# Altium PCB 底板201604281.PcbDoc (part 1 of 2)
Units mm, origin at the board's own origin, x right, y up, seen from the top; angles counter-clockwise.
Board outline 123.5 x 102.51 mm, 2 copper layers (Top Layer, Bottom Layer); 216 components, 211 nets, 709 pads, 236 vias.
Unrouted connection lines stored in the file: 63.
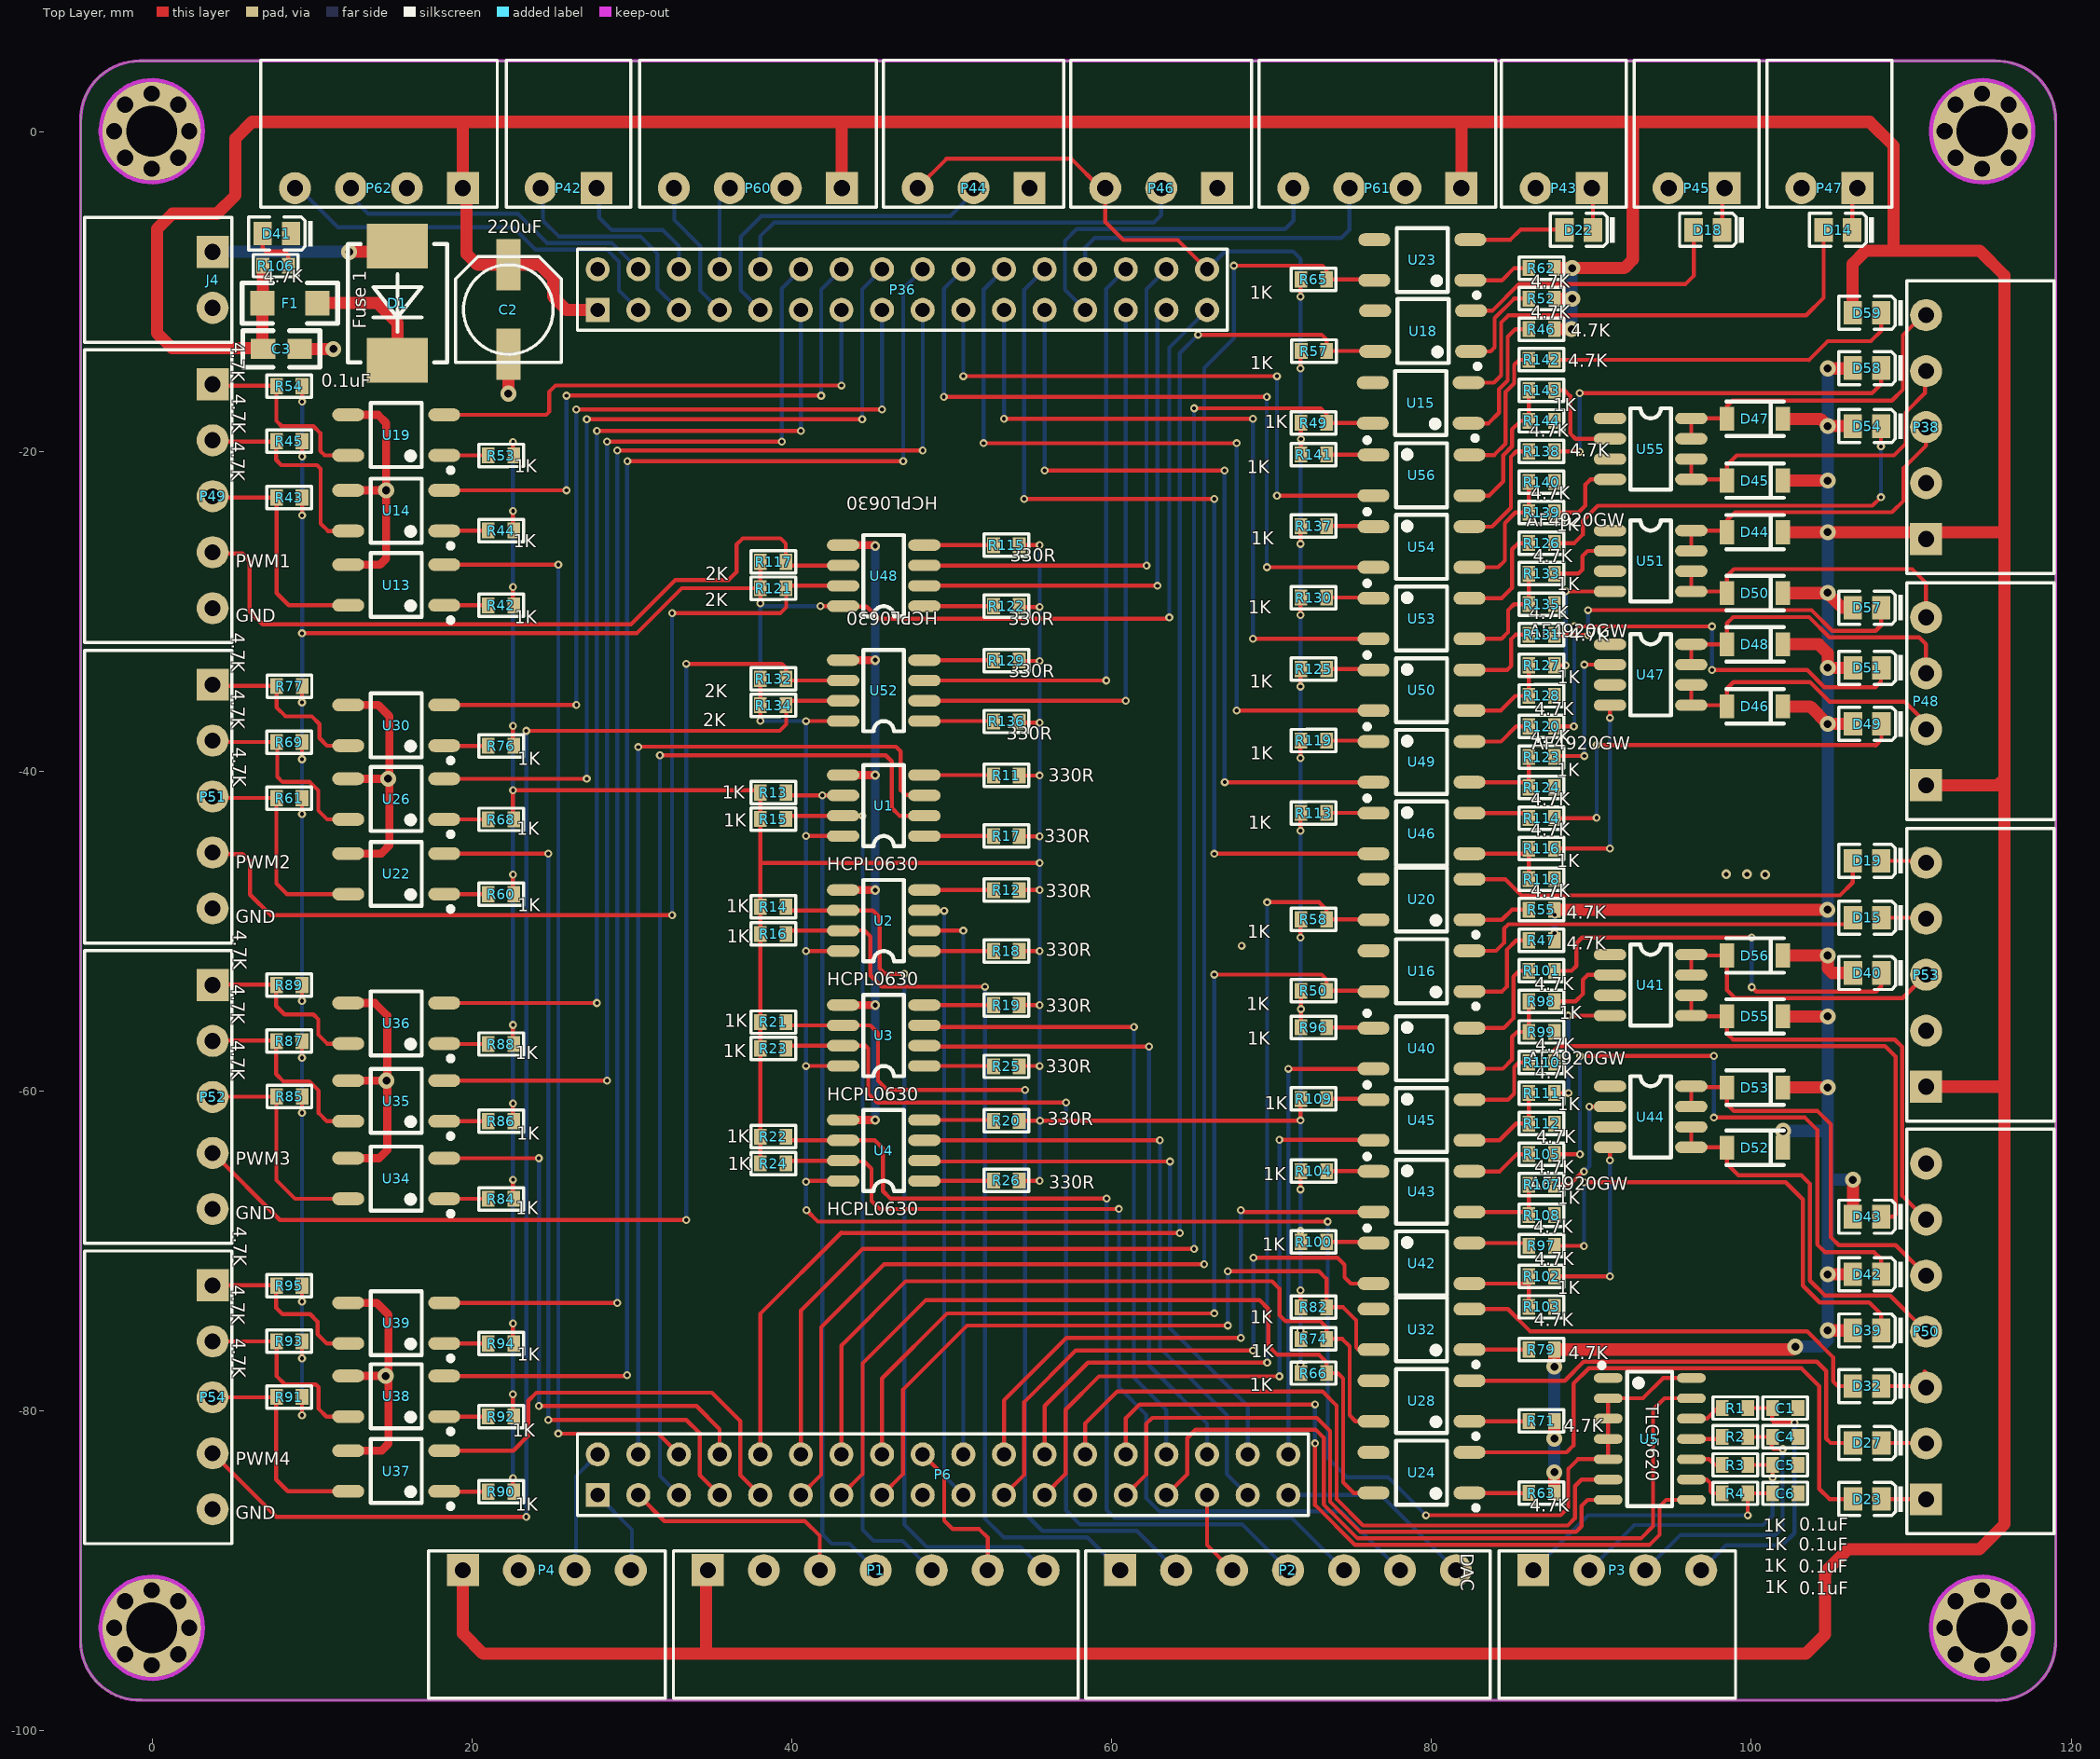
[diagram p0: Top Layer view]
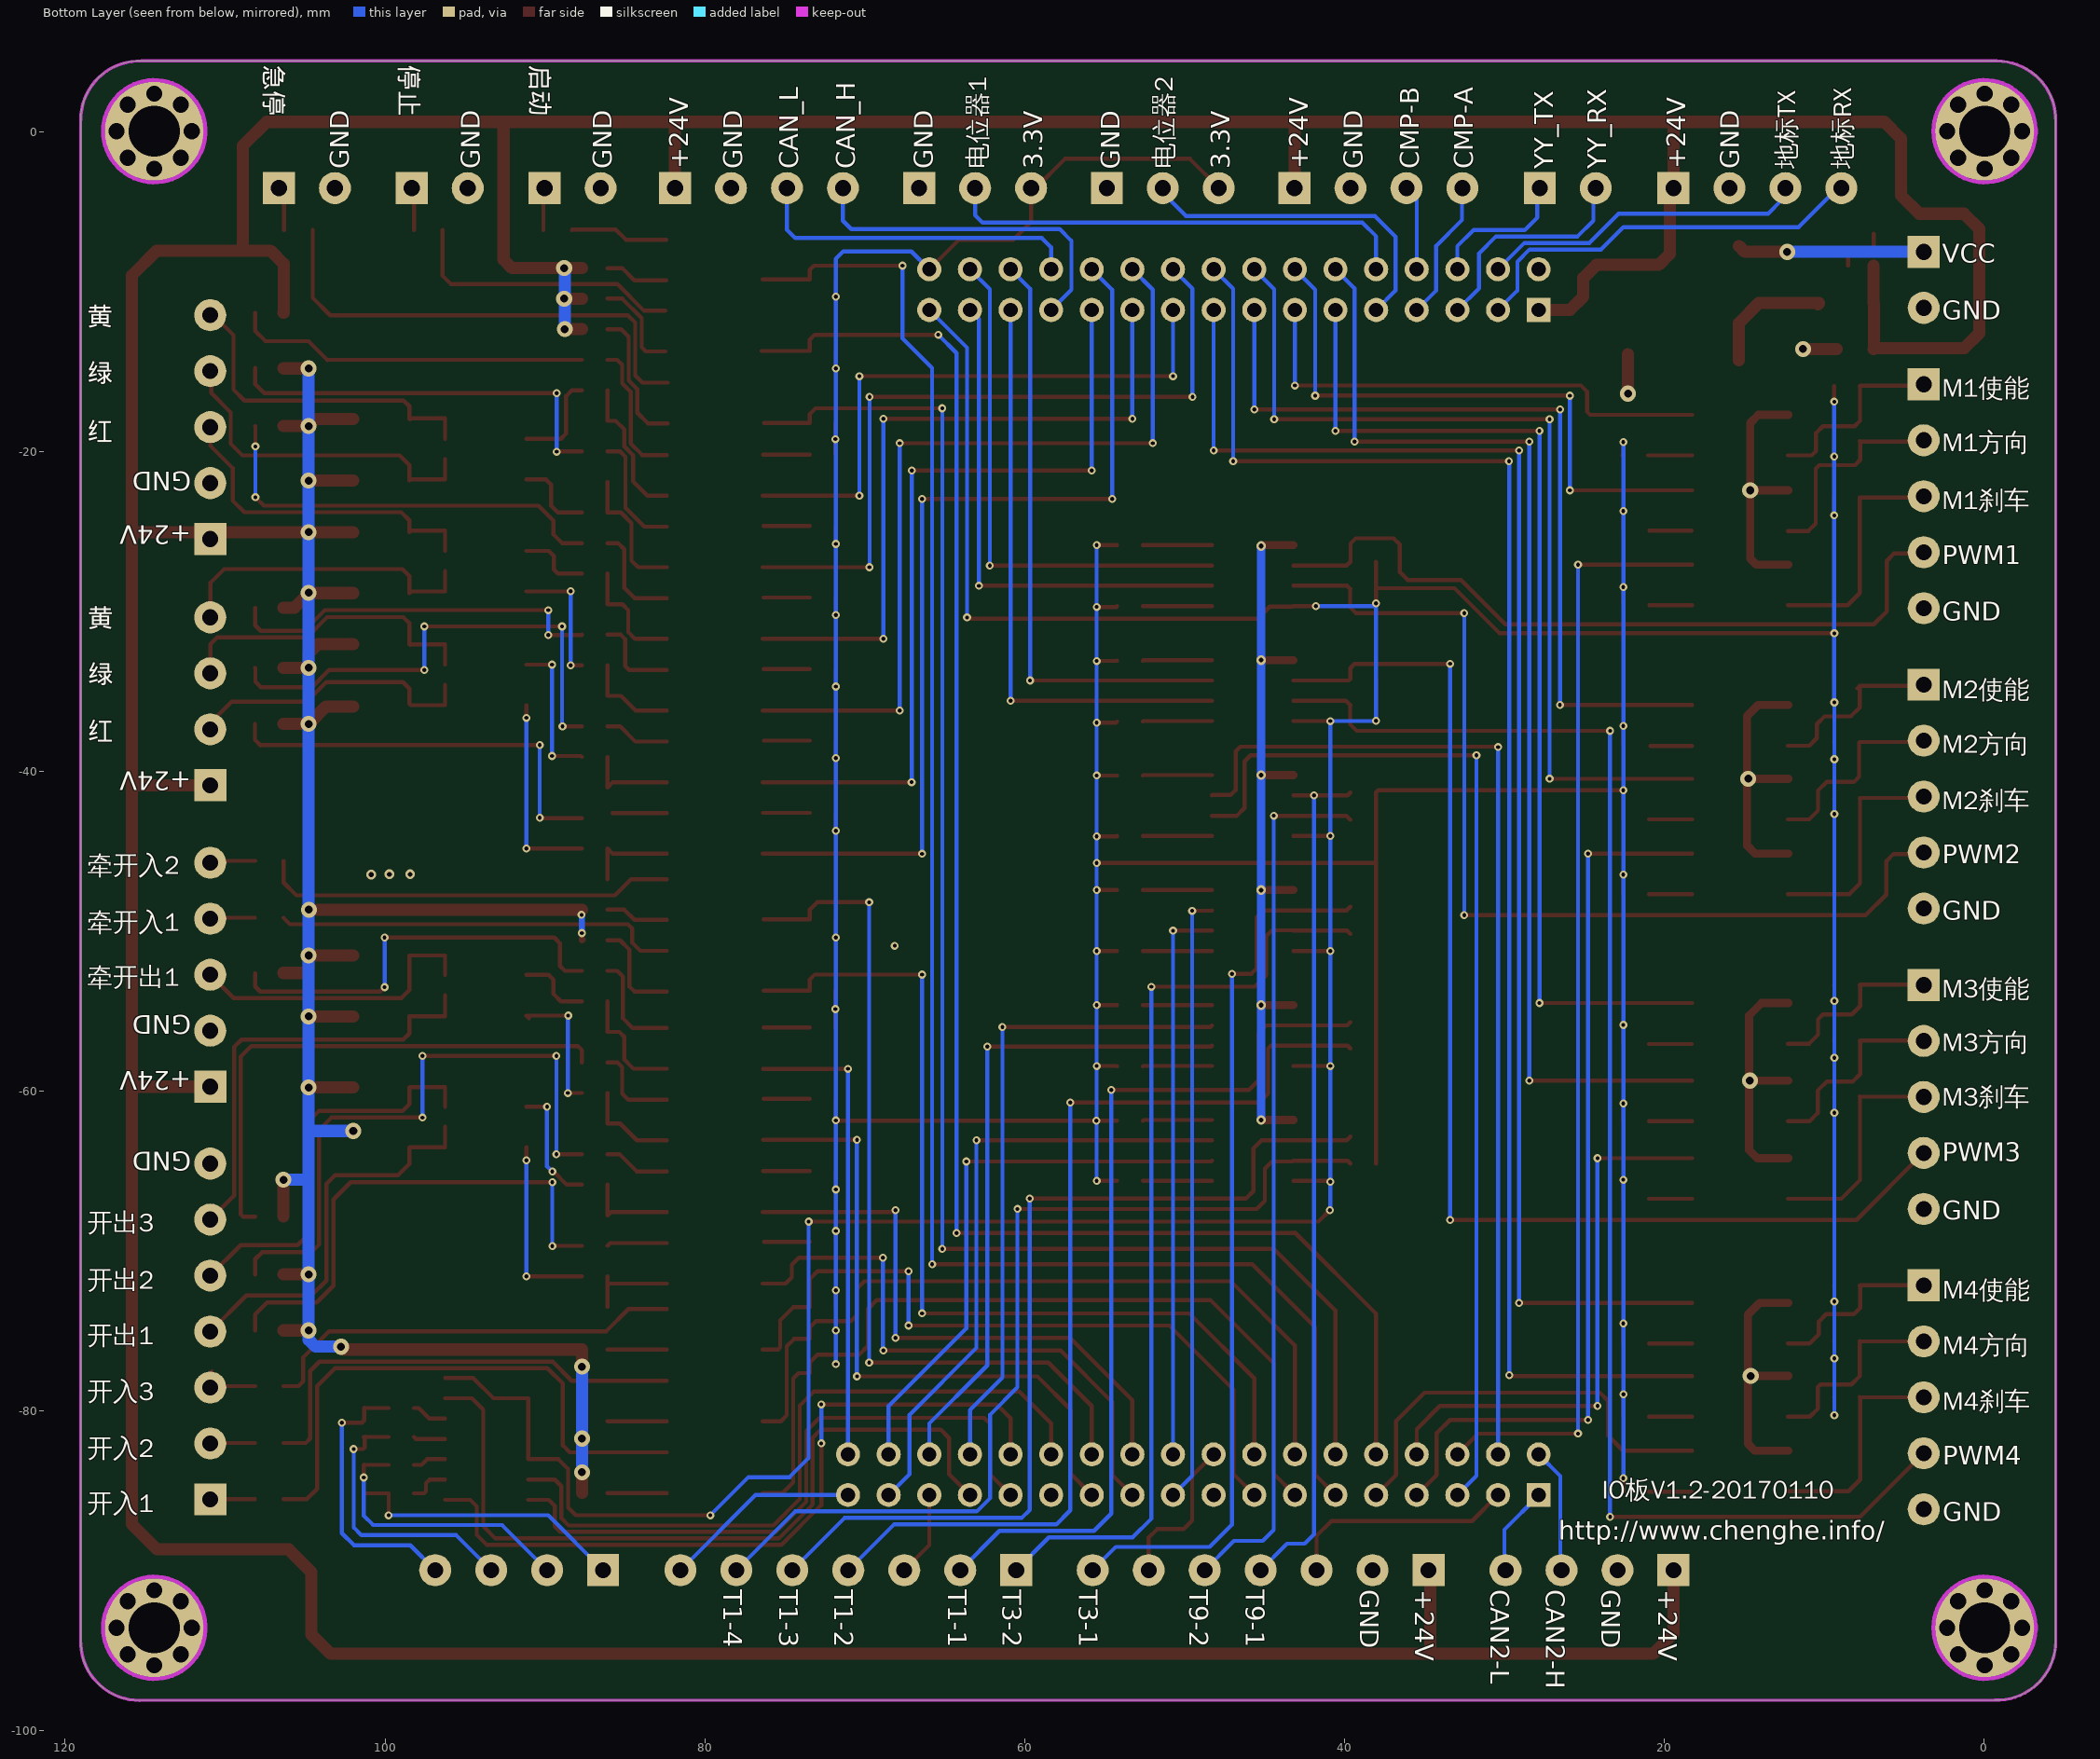
[diagram p1: Bottom Layer view, seen from below]
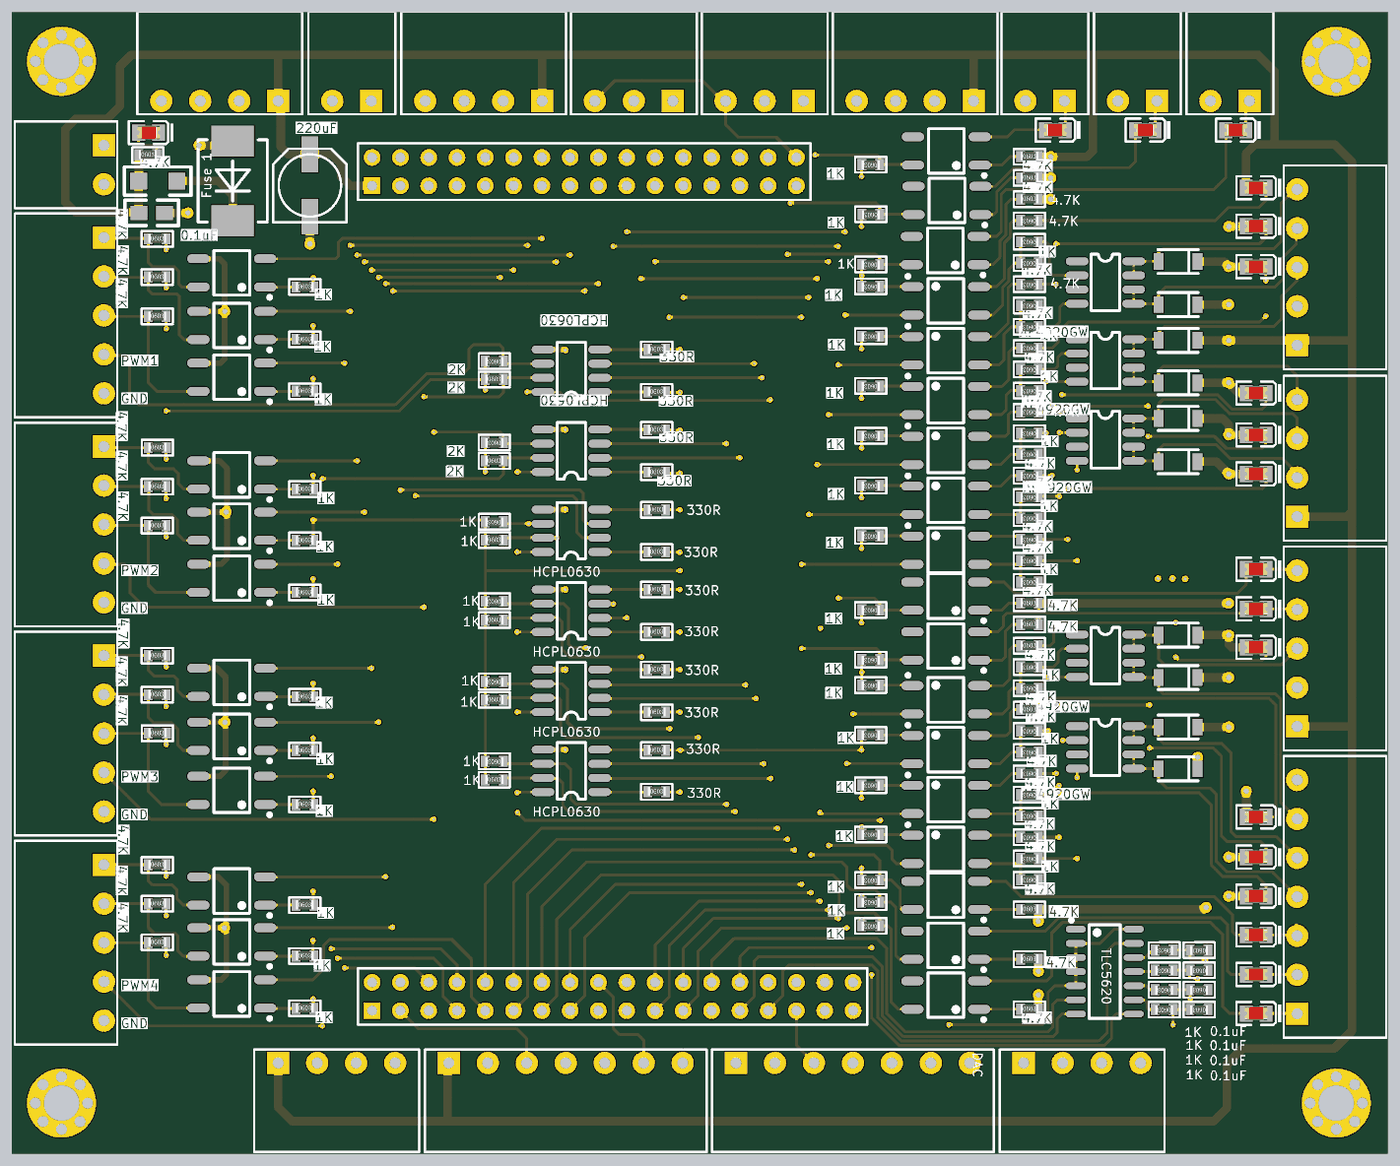
[diagram p3: 3D render of the assembled board from above, using the file's embedded part models]

## Layer stack, top to bottom
Top Solder: solder mask 0.0102, Solder Resist, Dk 3.5
Top Layer: signal copper 0.0356
Dielectric1: dielectric 0.32, FR-4, Dk 4.8
Bottom Layer: signal copper 0.0356
Bottom Solder: solder mask 0.0102, Solder Resist, Dk 3.5

## Board outline
-4.47,-94.389 -4.47,0.61 cw(c-0.792,0.731) -0.792,4.412 -0.792,4.42 115.222,4.42 115.222,4.415 cw(c115.344,0.737) 119.024,0.737 119.03,0.737 119.03,-94.285 cw(c115.351,-94.406) 115.351,-98.087 115.351,-98.08 -0.669,-98.069 -0.669,-98.067 cw(c-0.79,-94.389)

## Design rules (kind name [scope] priority, off if disabled: settings)
Clearance inpolygon [InPolygon] p1: gap=0.4
Clearance [All] p2: gap=0.152
HoleSize [All] p1: absolutevalues=TRUE maxlimit=12.7 minlimit=0.025 maxpercent=80.000 minpercent=20.000
HoleToHoleClearance [All] p1: gap=0.152 allowstackedmicrovias=TRUE
MinimumSolderMaskSliver [All] p1: minsoldermaskwidth=0.051
PolygonConnect [All] p1: connectstyle=Relief reliefconductorwidth=0.254 reliefentries=4 polygonreliefangle="90 Angle" airgapwidth=0.254
RoutingVias [All] p1: holewidth=0.711 width=1.27 viastyle="Through Hole" minholewidth=0.711 minwidth=1.27 maxholewidth=0.711 maxwidth=1.27
SilkToSilkClearance [All] p1: silktosilkclearance=-1
SilkToSolderMaskClearance SilkscreenOverComponentPads [IsPad] p1: minsilkscreentomaskgap=-1 clearancetoexposedcopper=TRUE
SolderMaskExpansion [All] p1: expansion=0.102
Width [All] p1: maxlimit=2.54 minlimit=0.152 preferedwidth=0.254 minimp=50.000000 maximp=50.000000 favimp=50.000000
25 further rules are at their usual default settings.

## Components (designator, comment, footprint, x,y, rotation, side; value= is the part's Value field where it differs from the comment)
C1 "0.1uF" 0603 102.121,-79.807 r180 top
C2 "220uF" CC6.56.5 22.276,-11.125 r270 top
C3 "0.1uF" 0805 6.934,-13.589 r0 top
C4 "0.1uF" 0603 102.121,-81.61 r180 top
C5 "0.1uF" 0603 102.121,-83.363 r180 top
C6 "0.1uF" 0603 102.121,-85.141 r180 top
D1 "" LC-SMC(DO-214AB)_S2 15.342,-10.719 r90 top
D14 "LED0" LC-0805_LED_S1 104.521,-6.147 r180 top
D15 "LED0" LC-0805_LED_S1 106.35,-49.149 r180 top
D18 "LED0" LC-0805_LED_S1 96.393,-6.147 r180 top
D19 "LED0" LC-0805_LED_S1 106.34,-45.593 r180 top
D22 "LED0" LC-0805_LED_S1 88.316,-6.147 r180 top
D23 "LED0" LC-0805_LED_S1 106.35,-85.496 r180 top
D27 "LED0" LC-0805_LED_S1 106.35,-81.991 r180 top
D32 "LED0" LC-0805_LED_S1 106.34,-78.435 r180 top
D39 "LED0" LC-0805_LED_S1 106.34,-74.955 r180 top
D40 "LED0" LC-0805_LED_S1 106.35,-52.603 r180 top
D41 "LED0" LC-0805_LED_S1 6.909,-6.375 r180 top
D42 "LED0" LC-0805_LED_S1 106.34,-71.45 r180 top
D43 "LED0" LC-0805_LED_S1 106.34,-67.843 r180 top
D44 "" LC-LL-34 101.976,-25.044 r180 top
D45 "" LC-LL-34 101.976,-21.819 r180 top
D46 "" LC-LL-34 101.976,-35.941 r180 top
D47 "" LC-LL-34 101.976,-17.958 r180 top
D48 "" LC-LL-34 101.976,-32.055 r180 top
D49 "LED0" LC-0805_LED_S1 106.35,-37.033 r180 top
D50 "" LC-LL-34 101.976,-28.854 r180 top
D51 "LED0" LC-0805_LED_S1 106.35,-33.528 r180 top
D52 "" LC-LL-34 101.976,-63.525 r180 top
D53 "" LC-LL-34 101.976,-59.766 r180 top
D54 "LED0" LC-0805_LED_S1 106.34,-18.415 r180 top
D55 "" LC-LL-34 101.976,-55.321 r180 top
D56 "" LC-LL-34 101.976,-51.511 r180 top
D57 "LED0" LC-0805_LED_S1 106.34,-29.769 r180 top
D58 "LED0" LC-0805_LED_S1 106.34,-14.783 r180 top
D59 "LED0" LC-0805_LED_S1 106.34,-11.328 r180 top
F1 "Fuse 1" 1206 10.338,-10.744 r180 top
J4 "CON2" DZ-2-3.5 3.785,-7.518 r270 top
P1 "通讯IO" DZ-7-3.5 34.747,-89.941 r0 top
P2 "通讯IO" DZ-7-3.5 60.528,-89.941 r0 top
P3 "DAC" DZ-4-3.5 86.36,-89.941 r0 top
P4 "DAC" DZ-4-3.5 19.431,-89.941 r0 top
P6 "Header 18X2" HDR2X18 27.864,-85.242 r0 top locked
P36 "Header 16X2" HDR2X16 27.864,-11.151 r0 top locked
P38 "三色灯" DZ-5-3.5 110.922,-25.476 r90 top
P42 "语音板通信" DZ-2-3.5 27.788,-3.531 r180 top
P43 "启动" DZ-2-3.5 90.018,-3.531 r180 top
P44 "电位器1" DZ-3-3.5 54.864,-3.531 r180 top
P45 "停止" DZ-2-3.5 98.323,-3.531 r180 top
P46 "电位器2" DZ-3-3.5 66.599,-3.531 r180 top
P47 "急停" DZ-2-3.5 106.629,-3.531 r180 top
P48 "三色灯" DZ-4-3.5 110.922,-40.869 r90 top
P49 "电机1" DZ-5-3.5 3.785,-15.798 r270 top
P50 "通讯IO" DZ-7-3.5 110.922,-85.522 r90 top
P51 "电机2" DZ-5-3.5 3.785,-34.577 r270 top
P52 "电机3" DZ-5-3.5 3.785,-53.357 r270 top
P53 "牵引杆" DZ-5-3.5 110.922,-59.715 r90 top
P54 "电机4" DZ-5-3.5 3.785,-72.136 r270 top
P60 "触摸屏RS485" DZ-4-3.5 43.129,-3.531 r180 top
P61 "CAN" DZ-4-3.5 81.864,-3.531 r180 top
P62 "RFID_RS232" DZ-4-3.5 19.431,-3.531 r180 top
R1 "1K" 0603 98.984,-79.807 r180 top
R2 "1K" 0603 98.984,-81.61 r180 top
R3 "1K" 0603 98.984,-83.363 r180 top
R4 "1K" 0603 98.984,-85.141 r180 top
R11 "330R" 0603 53.416,-40.259 r0 top
R12 "330R" 0603 53.416,-47.422 r0 top
R13 "1K" 0603 38.837,-41.326 r180 top
R14 "1K" 0603 38.837,-48.463 r180 top
R15 "1K" 0603 38.837,-42.977 r0 top
R16 "1K" 0603 38.837,-50.165 r0 top
R17 "330R" 0603 53.416,-44.044 r0 top
R18 "330R" 0603 53.416,-51.232 r0 top
R19 "330R" 0603 53.416,-54.61 r0 top
R20 "330R" 0603 53.416,-61.849 r0 top
R21 "1K" 0603 38.837,-55.677 r180 top
R22 "1K" 0603 38.837,-62.84 r180 top
R23 "1K" 0603 38.837,-57.328 r0 top
R24 "1K" 0603 38.837,-64.516 r0 top
R25 "330R" 0603 53.416,-58.445 r0 top
R26 "330R" 0603 53.416,-65.583 r0 top
R42 "1K" 0603 21.819,-29.616 r0 top
R43 "4.7K" 0603 8.577,-22.879 r0 top
R44 "1K" 0603 21.819,-24.943 r0 top
R45 "4.7K" 0603 8.577,-19.355 r0 top
R46 "4.7K" 0603 86.881,-12.355 r0 top
R47 "4.7K" 0603 86.881,-50.559 r0 top
R49 "1K" 0603 72.631,-18.212 r180 top
R50 "1K" 0603 72.631,-53.721 r180 top
R52 "4.7K" 0603 86.881,-10.445 r0 top
R53 "1K" 0603 21.819,-20.244 r0 top
R54 "4.7K" 0603 8.577,-15.919 r0 top
R55 "4.7K" 0603 86.881,-48.649 r0 top
R57 "1K" 0603 72.644,-13.716 r180 top
R58 "1K" 0603 72.631,-49.251 r180 top
R60 "1K" 0603 21.819,-47.676 r0 top
R61 "4.7K" 0603 8.577,-41.675 r0 top
R62 "4.7K" 0603 86.881,-8.534 r0 top
R63 "4.7K" 0603 86.881,-85.115 r0 top
R65 "1K" 0603 72.631,-9.246 r180 top
R66 "1K" 0603 72.631,-77.622 r180 top
R68 "1K" 0603 21.819,-43.002 r0 top
R69 "4.7K" 0603 8.577,-38.169 r0 top
R71 "4.7K" 0603 86.881,-80.62 r0 top
R74 "1K" 0603 72.631,-75.489 r180 top
R76 "1K" 0603 21.819,-38.405 r0 top
R77 "4.7K" 0603 8.585,-34.671 r0 top
R79 "4.7K" 0603 86.881,-76.149 r0 top
R82 "1K" 0603 72.631,-73.508 r180 top
R84 "1K" 0603 21.819,-66.726 r0 top
R85 "4.7K" 0603 8.585,-60.325 r0 top
R86 "1K" 0603 21.819,-61.874 r0 top
R87 "4.7K" 0603 8.577,-56.864 r0 top
R88 "1K" 0603 21.819,-57.048 r0 top
R89 "4.7K" 0603 8.577,-53.359 r0 top
R90 "1K" 0603 21.819,-85.039 r0 top
R91 "4.7K" 0603 8.577,-79.114 r0 top
R92 "1K" 0603 21.819,-80.34 r0 top
R93 "4.7K" 0603 8.577,-75.634 r0 top
R94 "1K" 0603 21.819,-75.768 r0 top
R95 "4.7K" 0603 8.577,-72.155 r0 top
R96 "1K" 0603 72.631,-56.007 r180 top
R97 "4.7K" 0603 86.881,-69.662 r180 top
R98 "1K" 0603 86.881,-54.38 r180 top
R99 "4.7K" 0603 86.881,-56.29 r180 top
R100 "1K" 0603 72.631,-69.418 r180 top
R101 "4.7K" 0603 86.881,-52.47 r0 top
R102 "1K" 0603 86.881,-71.572 r180 top
R103 "4.7K" 0603 86.881,-73.482 r180 top
R104 "1K" 0603 72.631,-64.999 r180 top
R105 "4.7K" 0603 86.881,-63.931 r180 top
R106 "4.7K" 0603 7.722,-8.382 r0 top
R107 "1K" 0603 86.881,-65.841 r180 top
R108 "4.7K" 0603 86.881,-67.752 r180 top
R109 "1K" 0603 72.631,-60.477 r180 top
R110 "4.7K" 0603 86.881,-58.2 r0 top
R111 "1K" 0603 86.881,-60.111 r180 top
R112 "4.7K" 0603 86.881,-62.021 r180 top
R113 "1K" 0603 72.631,-42.596 r180 top
R114 "4.7K" 0603 86.881,-42.919 r180 top
R115 "330R" 0603 53.416,-25.857 r0 top
R116 "1K" 0603 86.881,-44.829 r180 top
R117 "2K" 0603 38.837,-26.899 r180 top
R118 "4.7K" 0603 86.881,-46.739 r180 top
R119 "1K" 0603 72.631,-38.075 r180 top
R120 "4.7K" 0603 86.881,-37.188 r180 top
R121 "2K" 0603 38.837,-28.55 r0 top
R122 "330R" 0603 53.416,-29.667 r0 top
R123 "1K" 0603 86.881,-39.098 r180 top
R124 "4.7K" 0603 86.881,-41.008 r180 top
R125 "1K" 0603 72.631,-33.604 r180 top
R126 "4.7K" 0603 86.881,-25.727 r180 top
R127 "1K" 0603 86.881,-33.367 r180 top
R128 "4.7K" 0603 86.881,-35.278 r180 top
R129 "330R" 0603 53.416,-33.071 r0 top
R130 "1K" 0603 72.631,-29.134 r180 top
R131 "4.7K" 0603 86.881,-31.457 r180 top
R132 "2K" 0603 38.837,-34.214 r180 top
R133 "1K" 0603 86.881,-27.637 r180 top
R134 "2K" 0603 38.837,-35.865 r0 top
R135 "4.7K" 0603 86.881,-29.547 r180 top
R136 "330R" 0603 53.416,-36.881 r0 top
R137 "1K" 0603 72.631,-24.663 r180 top
R138 "4.7K" 0603 86.881,-19.996 r180 top
R139 "1K" 0603 86.881,-23.816 r180 top
R140 "4.7K" 0603 86.881,-21.906 r180 top
R141 "1K" 0603 72.631,-20.193 r180 top
R142 "4.7K" 0603 86.881,-14.265 r180 top
R143 "1K" 0603 86.881,-16.175 r180 top
R144 "4.7K" 0603 86.881,-18.086 r180 top
U1 "HCPL0630" SO-8 48.285,-44.044 r180 top
U2 "HCPL0630" SO-8 48.285,-51.232 r180 top
U3 "HCPL0630" SO-8 48.285,-58.42 r180 top
U4 "HCPL0630" SO-8 48.285,-65.608 r180 top
U5 "TLC5620" LC-SOIC-14_150mil 93.645,-81.737 r270 top
U13 "TLP127" LC-SOP-4_P2.54 18.263,-29.616 r180 top
U14 "TLP127" LC-SOP-4_P2.54 18.263,-24.968 r180 top
U15 "TLP127" LC-SOP-4_P2.54 82.321,-18.237 r180 top
U16 "TLP127" LC-SOP-4_P2.54 82.372,-53.762 r180 top
U18 "TLP127" LC-SOP-4_P2.54 82.474,-13.741 r180 top
U19 "TLP127" LC-SOP-4_P2.54 18.263,-20.244 r180 top
U20 "TLP127" LC-SOP-4_P2.54 82.372,-49.283 r180 top
U22 "TLP127" LC-SOP-4_P2.54 18.263,-47.676 r180 top
U23 "TLP127" LC-SOP-4_P2.54 82.423,-9.296 r180 top
U24 "TLP127" LC-SOP-4_P2.54 82.372,-85.115 r180 top
U26 "TLP127" LC-SOP-4_P2.54 18.263,-43.002 r180 top
U28 "TLP127" LC-SOP-4_P2.54 82.372,-80.636 r180 top
U30 "TLP127" LC-SOP-4_P2.54 18.263,-38.393 r180 top
U32 "TLP127" LC-SOP-4_P2.54 82.372,-76.157 r180 top
U34 "TLP127" LC-SOP-4_P2.54 18.263,-66.726 r180 top
U35 "TLP127" LC-SOP-4_P2.54 18.263,-61.874 r180 top
U36 "TLP127" LC-SOP-4_P2.54 18.263,-57.023 r180 top
U37 "TLP127" LC-SOP-4_P2.54 18.263,-85.014 r180 top
U38 "TLP127" LC-SOP-4_P2.54 18.263,-80.34 r180 top
U39 "TLP127" LC-SOP-4_P2.54 18.263,-75.768 r180 top
U40 "TLP127" LC-SOP-4_P2.54 76.372,-56.051 r0 top
U41 "AF4920GW" SO-8 91.161,-51.46 r0 top
U42 "TLP127" LC-SOP-4_P2.54 76.372,-69.488 r0 top
U43 "TLP127" LC-SOP-4_P2.54 76.372,-65.009 r0 top
U44 "AF4920GW" SO-8 91.161,-59.69 r0 top
U45 "TLP127" LC-SOP-4_P2.54 76.372,-60.53 r0 top
U46 "TLP127" LC-SOP-4_P2.54 76.372,-42.614 r0 top
U47 "AF4920GW" SO-8 91.161,-32.055 r0 top
U48 "HCPL0630" SO-8 48.285,-29.667 r180 top
U49 "TLP127" LC-SOP-4_P2.54 76.372,-38.135 r0 top
U50 "TLP127" LC-SOP-4_P2.54 76.372,-33.656 r0 top
U51 "AF4920GW" SO-8 91.161,-24.943 r0 top
U52 "HCPL0630" SO-8 48.285,-36.855 r180 top
U53 "TLP127" LC-SOP-4_P2.54 76.372,-29.177 r0 top
U54 "TLP127" LC-SOP-4_P2.54 76.372,-24.698 r0 top
U55 "AF4920GW" SO-8 91.161,-17.932 r0 top
U56 "TLP127" LC-SOP-4_P2.54 76.372,-20.218 r0 top
? "" "定位孔 Φ3.2" -0.025,0.025 r0 top
? "" "定位孔 Φ3.2" 114.427,0.025 r0 top
? "" "定位孔 Φ3.2" -0.025,-93.548 r0 top
? "" "定位孔 Φ3.2" 114.427,-93.548 r0 top

## Footprints (in the part's own frame and the unit in brackets; to place one, negate y for a bottom-side part, rotate by r counter-clockwise, add the part's x,y. Pads: shape width x height; smd on the part's side, far side on the other; paste and mask are expansions set on the pad)
0603 [mm]
  rect 0.8x1 smd: 1(-0.8,0) 2(0.8,0)
  silkscreen extent -1.4,-0.7 1.4,0.7, body extent -0.8,-0.37 0.8,0.43, height 0.45
0805 [mil]
  rect 60x50 smd: 1(0,0) 2(90,0)
  silkscreen extent -50,-45 140,45
1206 [mil]
  rect 60x60 smd: 1(0.22,-0.6) 2(135.22,-0.6)
  silkscreen extent -50,-51 185,49
CC6.56.5 [mm]
  rect 3.2x1.5 smd: 1(-2.794,0) 2(2.8,0)
  silkscreen extent -3.3,-3.3 3.3,3.3
DZ-2-3.5 [mm]
  rect 2x2 hole 1: 1(0,0)
  round 2 hole 1: 2(3.5,0)
  silkscreen extent -2.15,-8 5.65,1.2
DZ-3-3.5 [mm]
  rect 2x2 hole 1: 1(0,0)
  round 2 hole 1: 2(3.5,0) 3(7,0)
  silkscreen extent -2.15,-8 9.15,1.2
DZ-4-3.5 [mm]
  rect 2x2 hole 1: 1(0,0)
  round 2 hole 1: 2(3.5,0) 3(7,0) 4(10.5,0)
  silkscreen extent -2.15,-8 12.65,1.2
DZ-5-3.5 [mm]
  rect 2x2 hole 1: 1(0,0)
  round 2 hole 1: 2(3.5,0) 3(7,0) 4(10.5,0) 5(14,0)
  silkscreen extent -2.15,-8 16.15,1.2
DZ-7-3.5 [mm]
  rect 2x2 hole 1: 1(0,0)
  round 2 hole 1: 2(3.5,0) 3(7,0) 4(10.5,0) 5(14,0) 6(17.5,0) 7(21,0)
  silkscreen extent -2.15,-8 23.15,1.2
HDR2X16 [mm] "Connector; H"
  rect 1.5x1.5 hole 0.9: 1(0,0)
  round 1.5 hole 0.9: 2(0,2.54) 3(2.54,0) 4(2.54,2.54) 5(5.08,0) 6(5.08,2.54) 7(7.62,0) 8(7.62,2.54) 9(10.16,0) 10(10.16,2.54) 11(12.7,0) 12(12.7,2.54) 13(15.24,0) 14(15.24,2.54) 15(17.78,0) 16(17.78,2.54) 17(20.32,0) 18(20.32,2.54) 19(22.86,0) 20(22.86,2.54) 21(25.4,0) 22(25.4,2.54) 23(27.94,0) 24(27.94,2.54) 25(30.48,0) 26(30.48,2.54) 27(33.02,0) 28(33.02,2.54) 29(35.56,0) 30(35.56,2.54) 31(38.1,0) 32(38.1,2.54)
  silkscreen extent -1.27,-1.27 39.37,3.81
HDR2X18 [mm] "Connector; Header; 18"
  rect 1.5x1.5 hole 0.9: 1(0,0)
  round 1.5 hole 0.9: 2(0,2.54) 3(2.54,0) 4(2.54,2.54) 5(5.08,0) 6(5.08,2.54) 7(7.62,0) 8(7.62,2.54) 9(10.16,0) 10(10.16,2.54) 11(12.7,0) 12(12.7,2.54) 13(15.24,0) 14(15.24,2.54) 15(17.78,0) 16(17.78,2.54) 17(20.32,0) 18(20.32,2.54) 19(22.86,0) 20(22.86,2.54) 21(25.4,0) 22(25.4,2.54) 23(27.94,0) 24(27.94,2.54) 25(30.48,0) 26(30.48,2.54) 27(33.02,0) 28(33.02,2.54) 29(35.56,0) 30(35.56,2.54) 31(38.1,0) 32(38.1,2.54) 33(40.64,0) 34(40.64,2.54) 35(43.18,0) 36(43.18,2.54)
  silkscreen extent -1.27,-1.27 44.45,3.81
LC-0805_LED_S1 [mm]
  rect 1.16x1.47 smd: A(0.001,0) K(-1.779,0)
  silkscreen extent -3.13,-1.04 0.88,1.03, body extent -1.9,-0.62 0.12,0.62, height 1.1
LC-LL-34 [mm]
  rect 0.9x1.5 smd: 1(3.5,0) 2(0,0)
  silkscreen extent -0.05,-1.08 3.55,1.07
LC-SMC(DO-214AB)_S2 [mil]
  rect 110x150 smd: 1(140.49,0) 2(-140.49,0)
  silkscreen extent -146,-122 146,122
LC-SOIC-14_150mil [mm]
  oval 0.6x1.8 smd: 1(-3.81,-2.6) 2(-2.54,-2.6) 3(-1.27,-2.6) 4(0,-2.6) 5(1.27,-2.6) 6(2.54,-2.6) 7(3.81,-2.6) 8(3.81,2.6) 9(2.54,2.6) 10(1.27,2.6) 11(0,2.6) 12(-1.27,2.6) 13(-2.54,2.6) 14(-3.81,2.6)
  silkscreen extent -4.75,-3.15 4.2,1.4
LC-SOP-4_P2.54 [mm]
  oval 2x0.8 smd: 1(0,0) 2(0,-2.54) 3(6,-2.54) 4(6,0)
  silkscreen extent -0.55,-3.27 4.6,1.08
SO-8 [mil]
  oval 80x28 smd: 1(0,0) 2(0,-50) 3(0,-100) 4(0,-150) 5(200,-150) 6(200,-100) 7(200,-50) 8(200,0)
  silkscreen extent 50,-175 150,25
"定位孔 Φ3.2" [mm]
  round 1 hole 1 unplated: 1(-2.35,0) 1(-1.662,-1.662) 1(-1.662,1.662) 1(0,-2.35) 1(0,2.35) 1(1.662,-1.662) 1(1.662,1.662) 1(2.35,0)
  round 6.2 hole 3.2: 1(0,0)
  Keep-Out Layer circle w0.254: c0,0 r3.2

## Part data
D1: library part DIODE
D14 D15 D18 D19 D22 D23 D27 D32 D39 D40 D41 D42 D43 D49 D51 D54 D57 D58 D59: "Typical INF"
D44 D45 D46 D47 D48 D50 D52 D53 D55 D56: library part DIODE, "Dio"
J4: "Connect"
P1 P2: library part "Header 7", "Header,"
P3 P4 P61: library part "Header 4", "Header,"
P6: "Header, 18-Pin, Dual row"
P36: "Header, 16-Pin, Dual row"
P38 P49 P51 P52 P53 P54: library part "Header 5", "Header, 5-P"
P42 P43 P45: library part "Header 2", "Header, 2-P"
P44 P46: library part "Header 3", "Header, 3-P"
P47: library part "Header 2", "Header,"
P48 P60 P62: library part "Header 4", "Header, 4-P"
P50: library part "Header 7", "Header, 7-P"
U1 U2 U3 U4: library part HC
U5: library part Compo
U41 U44 U47 U51 U55: library part AF492
U48 U52: library part HCPL06

## Via types
v1: diameter 0.5, hole 0.25, Top Layer to Bottom Layer, 198 vias
v2: diameter 1, hole 0.5, Top Layer to Bottom Layer, 29 vias
v3: diameter 0.6, hole 0.3, Top Layer to Bottom Layer, 9 vias

## Nets (pads, with @x,y where several pads share a name; then routed paths per layer and width w, separated by ;. In a path a pad name is that pad's centre, name@x,y a point inside that pad or via, vN(x,y) a via of type N, cw(c..) or ccw(c..) an arc to the next point about the centre after c; other vN are vias at no path point)
BY_KC1: P36.21 U53.2 | length 43.7
  Top Layer w0.254: v1(53.264,-17.958) v1(68.834,-17.958) ; v1(68.842,-31.717) U53.2@76.372,-31.717
  Bottom Layer w0.254: v1(53.264,-17.958) P36.21@53.264,-11.151 ; v1@68.834,-31.717 v1(68.834,-17.958)
BY_KC2: P36.20 U54.2 | length 46
  Top Layer w0.254: v1(49.505,-16.586) v1(69.698,-16.586) ; v1(69.706,-27.238) U54.2@76.372,-27.238
  Bottom Layer w0.254: v1(49.505,-16.586) 49.505,-9.83 P36.20@50.724,-8.611 ; v1@69.698,-27.238 v1(69.698,-16.586)
BY_KC3: P36.19 U56.2 | length 37.3
  Top Layer w0.254: v1(50.724,-15.291) v1(70.333,-15.291) ; v1(70.333,-22.758) U56.2@76.372,-22.758
  Bottom Layer w0.254: v1(50.724,-15.291) P36.19@50.724,-11.151 ; v1(70.333,-22.758) v1(70.333,-15.291)
BY_KC11: D44.1 P38.3 U51.7 U51.8 | length 21.2
  Top Layer w0.254: U51.7@96.241,-26.213 U51.8@96.241,-24.943 98.374,-24.943 D44.1@98.476,-25.044 98.476,-24.308 98.984,-23.8 108.788,-23.8 109.525,-23.063 109.525,-21.031 110.922,-19.634 P38.3@110.922,-18.273
BY_KC22: D45.1 P38.4 U55.5 U55.6 | length 21.5
  Top Layer w0.254: U55.6@96.241,-20.472 U55.5@96.241,-21.742 98.4,-21.742 D45.1@98.476,-21.819 98.476,-20.853 99.085,-20.244 108.915,-20.244 109.642,-19.517 109.642,-17.561 110.846,-16.358 110.846,-14.849 P38.4@110.922,-14.773
BY_KC33: D47.1 P38.5 U55.7 U55.8 | length 21.2
  Top Layer w0.254: U55.7@96.241,-19.202 U55.8@96.241,-17.932 98.4,-17.932 98.45,-17.983 D47.1@98.476,-17.958 98.476,-17.17 98.831,-16.815 108.788,-16.815 109.474,-16.129 109.474,-12.721 P38.5@110.922,-11.273
CAN2_H: P4.3 P6.2 | length 7.8
  Bottom Layer w0.254: P4.3@26.507,-89.941 26.507,-84.059 P6.2@27.864,-82.702
CAN2_L: P4.4 P6.1 | length 5.6
  Bottom Layer w0.254: P6.1@27.864,-85.242 27.864,-85.268 30.007,-87.411 P4.4@30.007,-89.941
CAN_H: P36.25 P61.4 | length 21.7
  Bottom Layer w0.254: P36.25@58.344,-11.151 57.074,-9.881 57.074,-6.833 57.81,-6.096 70.841,-6.096 71.364,-5.572 P61.4@71.364,-3.531
CAN_L: P36.26 P61.3 | length 21
  Bottom Layer w0.254: P36.26@58.344,-8.611 58.344,-7.239 58.928,-6.655 74.346,-6.655 74.864,-6.136 P61.3@74.864,-3.531
CLK: P6.27 U5.7 | length 41.1
  Top Layer w0.254: P6.27@60.884,-85.242 62.154,-83.972 62.154,-80.797 62.535,-80.416 72.822,-80.416 73.66,-81.255 73.66,-85.665 75.549,-87.554 89.027,-87.554 89.383,-87.198 89.383,-85.928 89.764,-85.547 U5.7@91.045,-85.547
DAC1: C1.2 P3.4 R1.1 | length 17.5
  Top Layer w0.254: R1.1@99.784,-79.807 101.244,-79.807 101.27,-79.781 101.295,-79.807 101.295,-80.569 101.448,-80.721 v1(102.692,-80.721)
  Bottom Layer w0.254: P3.4@96.86,-89.941 98.409,-88.392 101.93,-88.392 102.692,-87.63 v1(102.692,-80.721)
DAC2: C4.2 P3.3 R2.1 | length 17.6
  Top Layer w0.254: R2.1@99.784,-81.61 C4.2@101.27,-81.61 ; C4.2@101.244,-81.585 C4.2@101.27,-81.61 ; C4.2@101.321,-81.61 C4.2@101.27,-81.61 ; v1(101.956,-82.372) 101.371,-82.372 101.27,-82.271 C4.2@101.27,-81.61
  Bottom Layer w0.254: P3.3@93.36,-89.941 95.544,-87.757 101.473,-87.757 101.956,-87.274 v1(101.956,-82.372)
DAC3: C5.2 P3.2 R3.1 | length 17.5
  Top Layer w0.254: R3.1@99.784,-83.363 101.27,-83.363 101.295,-83.337 C5.2@101.321,-83.363 v1@101.321,-84.074
  Bottom Layer w0.254: P3.2@89.86,-89.941 92.679,-87.122 100.736,-87.122 101.321,-86.538 v1(101.321,-84.15)
DAC4: C6.2 P3.1 R4.1 | length 17.8
  Top Layer w0.254: P3.1@86.284,-89.941 P3.1@86.296,-89.929 ; v1(99.771,-86.512) 99.771,-85.153 R4.1@99.784,-85.141 101.244,-85.141 101.27,-85.115 C6.2@101.295,-85.141
  Bottom Layer w0.254: P3.1@86.36,-89.941 89.789,-86.512 v1(99.771,-86.512)
DATA: P6.26 U5.6 | length 44.7
  Top Layer w0.254: P6.26@58.344,-82.702 58.344,-80.772 60.35,-78.765 73.177,-78.765 74.066,-79.654 74.066,-85.496 75.717,-87.147 88.519,-87.147 88.976,-86.69 88.976,-84.684 89.383,-84.277 U5.6@91.045,-84.277
DJ1_KC1: P6.6 U13.2 | length 69.5
  Top Layer w0.254: U13.2@18.263,-27.076 v1(25.4,-27.076) ; v1(25.4,-81.407) 31.648,-81.407 P6.6@32.944,-82.702
  Bottom Layer w0.254: v1(25.4,-81.407) v1(25.4,-27.076)
DJ1_KC2: P36.14 U14.2 | length 37.9
  Top Layer w0.254: U14.2@18.263,-22.428 v1(25.908,-22.428) ; v1(25.908,-16.51) 25.916,-16.502 41.826,-16.502 v1(41.834,-16.51)
  Bottom Layer w0.254: v1(25.908,-22.428) v1(25.908,-16.51) ; v1(41.834,-16.51) 41.834,-9.881 P36.14@43.104,-8.611
DJ1_KC3: P36.13 U19.2 | length 31.1
  Top Layer w0.254: U19.2@18.263,-17.704 24.638,-17.704 24.841,-17.501 24.841,-16.256 25.222,-15.875 v1(43.104,-15.875)
  Bottom Layer w0.254: v1(43.104,-15.875) P36.13@43.104,-11.151
DJ1_KC11: P49.3 R43.1 U13.4 | length 14.8
  Top Layer w0.254: P49.3@3.785,-22.883 7.773,-22.883 R43.1@7.777,-22.879 7.777,-28.859 8.534,-29.616 U13.4@12.263,-29.616
DJ1_KC22: P49.2 R45.1 U14.4 | length 13.5
  Top Layer w0.254: P49.2@3.785,-19.383 R45.1@7.749,-19.383 ; R45.1@7.777,-19.355 R45.1@7.749,-19.383 ; U14.4@12.263,-24.968 10.998,-24.968 10.541,-24.511 10.541,-21.082 10.312,-20.853 8.077,-20.853 7.749,-20.526 R45.1@7.749,-19.383
DJ1_KC33: P49.1 R54.1 U19.4 | length 12.2
  Top Layer w0.254: P49.1@3.785,-15.883 7.741,-15.883 R54.1@7.777,-15.919 7.772,-15.924 7.772,-18.085 8.103,-18.415 10.084,-18.415 10.516,-18.847 10.516,-19.964 10.795,-20.244 U19.4@12.263,-20.244
DJ2_KC1: P6.7 U22.2 | length 56.1
  Top Layer w0.254: U22.2@18.263,-45.136 v1(24.765,-45.136) ; v1(24.765,-80.543) 33.401,-80.543 34.239,-81.382 34.239,-83.998 P6.7@35.484,-85.242
  Bottom Layer w0.254: v1(24.765,-80.543) v1(24.765,-45.136)
DJ2_KC2: P36.16 U26.2 | length 58.5
  Top Layer w0.254: U26.2@18.263,-40.462 v1(27.178,-40.462) ; v1(27.178,-17.983) v1(44.399,-17.983)
  Bottom Layer w0.254: v1(27.178,-40.462) v1(27.178,-17.983) ; v1(44.399,-17.983) 44.399,-9.855 P36.16@45.644,-8.611
DJ2_KC3: P36.15 U30.2 | length 52.1
  Top Layer w0.254: U30.2@18.263,-35.853 v1(26.531,-35.853) ; v1(26.518,-17.374) v1(45.644,-17.374)
  Bottom Layer w0.254: v1(26.531,-35.853) v1@26.531,-17.374 ; v1(45.644,-17.374) P36.15@45.644,-11.151
DJ2_KC11: P51.3 R61.1 U22.4 | length 14.1
  Top Layer w0.254: P51.3@3.785,-41.662 R61.1@7.765,-41.662 ; R61.1@7.777,-41.675 R61.1@7.765,-41.662 ; U22.4@12.263,-47.676 8.433,-47.676 7.765,-47.008 R61.1@7.765,-41.662
DJ2_KC22: P51.2 R69.1 U26.4 | length 12.5
  Top Layer w0.254: P51.2@3.785,-38.162 7.77,-38.162 R69.1@7.777,-38.169 7.823,-38.215 7.823,-40.335 8.153,-40.665 9.855,-40.665 10.389,-41.199 10.389,-42.443 10.947,-43.002 U26.4@12.263,-43.002
DJ2_KC33: P51.1 R77.1 U30.4 | length 11.5
  Top Layer w0.254: P51.1@3.785,-34.662 R77.1@7.776,-34.662 ; R77.1@7.925,-34.811 R77.1@7.785,-34.671 R77.1@7.776,-34.662 ; U30.4@12.263,-38.393 10.936,-38.393 10.465,-37.922 10.465,-37.047 9.982,-36.564 8.345,-36.564 7.776,-35.996 R77.1@7.776,-34.662
DJ3_KC1: P6.8 U34.2 | length 34.9
  Top Layer w0.254: U34.2@18.263,-64.186 v1(24.181,-64.186) ; v1(24.181,-79.68) 34.036,-79.68 35.484,-81.128 P6.8@35.484,-82.702
  Bottom Layer w0.254: v1(24.181,-79.68) v1(24.181,-64.186)
DJ3_KC2: P36.12 U35.2 | length 72.3
  Top Layer w0.254: U35.2@18.263,-59.334 v1(28.448,-59.334) ; v1(28.448,-19.38) v1(39.37,-19.38)
  Bottom Layer w0.254: v1(28.448,-59.334) v1(28.448,-19.38) ; v1(39.37,-19.38) 39.37,-9.804 P36.12@40.564,-8.611
DJ3_KC3: P36.11 U36.2 | length 65.6
  Top Layer w0.254: U36.2@18.263,-54.483 v1(27.813,-54.483) ; v1(27.813,-18.72) v1(40.564,-18.72)
  Bottom Layer w0.254: v1(27.813,-54.483) v1(27.813,-18.72) ; v1(40.564,-18.72) P36.11@40.564,-11.151
DJ3_KC11: P52.3 R85.1 U34.4 | length 14.2
  Top Layer w0.254: P52.3@3.785,-60.339 R85.1@7.771,-60.339 ; R85.1@7.785,-60.325 R85.1@7.771,-60.339 ; U34.4@12.263,-66.726 8.941,-66.726 7.771,-65.556 R85.1@7.771,-60.339
DJ3_KC22: P52.2 R87.1 U35.4 | length 12.6
  Top Layer w0.254: P52.2@3.785,-56.839 R87.1@7.753,-56.839 ; R87.1@7.777,-56.864 R87.1@7.753,-56.839 ; U35.4@12.263,-61.874 10.922,-61.874 10.414,-61.366 10.414,-59.969 9.83,-59.385 8.204,-59.385 7.753,-58.934 R87.1@7.753,-56.839
DJ3_KC33: P52.1 R89.1 U36.4 | length 11.4
  Top Layer w0.254: P52.1@3.785,-53.339 R89.1@7.758,-53.339 ; R89.1@7.777,-53.359 R89.1@7.758,-53.339 ; U36.4@12.263,-57.023 10.947,-57.023 10.389,-56.464 10.389,-55.499 10.084,-55.194 8.28,-55.194 7.758,-54.672 R89.1@7.758,-53.339
DJ4_KC1: P6.9 U37.2 | length 27.2
  Top Layer w0.254: U37.2@18.263,-82.474 22.581,-82.474 23.52,-81.534 23.52,-79.35 24.028,-78.842 35.001,-78.842 36.779,-80.62 36.779,-83.998 P6.9@38.024,-85.242
DJ4_KC2: P36.18 U38.2 | length 98.3
  Top Layer w0.254: U38.2@18.263,-77.8 v1@29.642,-77.8 ; v1(29.718,-20.599) v1(46.965,-20.599)
  Bottom Layer w0.254: v1@29.718,-77.775 v1(29.693,-77.749) 29.693,-20.625 v1(29.718,-20.599) ; v1(46.965,-20.599) 46.965,-9.83 P36.18@48.184,-8.611
DJ4_KC3: P36.17 U39.2 | length 92
  Top Layer w0.254: U39.2@18.263,-73.228 v1(29.083,-73.228) ; v1(29.083,-19.939) v1(48.184,-19.939)
  Bottom Layer w0.254: v1(29.083,-73.228) v1(29.083,-19.939) ; v1(48.184,-19.939) P36.17@48.184,-11.151
DJ4_KC11: P54.3 R91.1 U37.4 | length 14
  Top Layer w0.254: P54.3@3.785,-79.136 R91.1@7.756,-79.136 ; R91.1@7.777,-79.114 R91.1@7.756,-79.136 ; U37.4@12.263,-85.014 8.484,-85.014 7.756,-84.286 R91.1@7.756,-79.136
DJ4_KC22: P54.2 R93.1 U38.4 | length 12.5
  Top Layer w0.254: P54.2@3.785,-75.636 R93.1@7.776,-75.636 ; R93.1@7.777,-75.634 R93.1@7.776,-75.636 ; U38.4@12.263,-80.34 10.897,-80.34 10.414,-79.858 10.414,-78.511 10.237,-78.335 8.307,-78.335 7.776,-77.804 R93.1@7.776,-75.636
DJ4_KC33: P54.1 R95.1 U39.4 | length 11.3
  Top Layer w0.254: P54.1@3.785,-72.136 R95.1@7.759,-72.136 ; R95.1@7.777,-72.155 R95.1@7.759,-72.136 ; U39.4@12.263,-75.768 10.922,-75.768 10.338,-75.184 10.338,-74.397 9.881,-73.939 8.153,-73.939 7.759,-73.545 R95.1@7.759,-72.136
DWQ1: P36.9 P44.2 | length 21.1
  Bottom Layer w0.254: P36.9@38.024,-11.151 36.805,-9.931 36.805,-6.579 38.1,-5.283 49.911,-5.283 51.339,-3.856 P44.2@51.339,-3.531
DWQ2: P36.10 P46.2 | length 29.4
  Bottom Layer w0.254: P36.10@38.024,-8.611 38.024,-6.553 38.887,-5.69 62.636,-5.69 63.099,-5.227 P46.2@63.099,-3.531
GND24_B: C1.1 C2.2 C3.2 C4.1 C5.1 C6.1 D41.K J4.2 P1.2 P4.2 P36.2 P38.2 P43.2 P44.1 P45.2 P46.1 P47.2 P49.5 P50.7 P51.5 P52.5 P53.2 P54.5 P60.2 P61.2 P62.2 R99.1 R103.1 R108.1 R112.1 R118.1 R124.1 R128.1 R135.1 R140.1 R144.1 U1.5 U2.5 U3.5 U4.5 U5.1 U13.3 U14.3 U15.3 U16.3 U18.3 U19.3 U20.3 U22.3 U23.3 U24.3 U26.3 U28.3 U30.3 U32.3 U34.3 U35.3 U36.3 U37.3 U38.3 U39.3 U41.1 U41.3 U44.1 U44.3 U47.1 U47.3 U48.5 U51.1 U51.3 U52.5 U55.1 U55.3 | length 116.9
  Top Layer w0.508: U37.3@12.263,-82.474 14.351,-82.474 14.783,-82.042 14.783,-73.965 14.046,-73.228 U39.3@12.263,-73.228 ; U38.3@12.263,-77.8 v2(14.605,-77.8) ; U34.3@12.263,-64.186 14.199,-64.186 14.707,-63.678 14.707,-55.27 13.919,-54.483 U36.3@12.263,-54.483 ; U35.3@12.263,-59.334 v2(14.656,-59.334) ; U22.3@12.263,-45.136 14.326,-45.136 14.834,-44.628 14.834,-36.551 14.136,-35.853 U30.3@12.263,-35.853 ; U26.3@12.263,-40.462 v2(14.757,-40.462) ; U13.3@12.263,-27.076 14.249,-27.076 14.63,-26.695 v2(14.63,-22.428) ; U14.3@12.263,-22.428 v2(14.63,-22.428) ; U19.3@12.263,-17.704 14.122,-17.704 14.63,-18.212 v2(14.63,-22.428) ; U4.5@43.205,-61.798 v3(45.212,-61.798) ; U3.5@43.205,-54.61 v3(45.212,-54.61) ; U2.5@43.205,-47.422 v3(45.212,-47.422) ; U1.5@43.205,-40.234 v3(45.212,-40.234) ; U52.5@43.205,-33.045 v3(45.212,-33.045) ; U48.5@43.205,-25.857 45.161,-25.857 v3(45.212,-25.908)
  Top Layer w0.762: C3.2@9.22,-13.589 v2(11.328,-13.589) ; v2(22.276,-16.383) C2.2@22.276,-13.925
  Bottom Layer w0.508: v3(45.212,-61.798) v3(45.212,-47.422) v3(45.212,-40.234) v3(45.212,-33.045) v3(45.212,-25.908)
  other v1: 68.123,-50.902
  other v3: 100.863,-46.457 98.425,-46.431 99.72,-46.431
IN_2: P6.4 U1.3 | length 64.8
  Top Layer w0.254: v1(30.404,-38.481) 30.425,-38.46 46.511,-38.46 46.812,-38.76 46.812,-41.173 47.117,-41.478 48.26,-41.478 U1.3@48.285,-41.504
  Bottom Layer w0.254: P6.4@30.404,-82.702 v1(30.404,-38.481)
IN_3: P6.5 U1.2 | length 66.6
  Top Layer w0.254: v1(31.75,-38.989) 45.872,-38.989 46.253,-39.37 46.253,-42.291 46.736,-42.774 U1.2@48.285,-42.774
  Bottom Layer w0.254: v1(31.75,-38.989) 31.75,-84.049 P6.5@32.944,-85.242
IN_13: P6.19 U2.3 | length 38.3
  Top Layer w0.254: U2.3@48.285,-48.692 48.311,-48.717 v1(49.53,-48.717)
  Bottom Layer w0.254: v1(49.53,-48.717) 49.53,-84.049 P6.19@50.724,-85.242
IN_14: P6.20 U2.2 | length 35.2
  Top Layer w0.254: U2.2@48.285,-49.962 v1(50.724,-49.962)
  Bottom Layer w0.254: P6.20@50.724,-82.702 v1(50.724,-49.962)
IN_19: P6.30 U3.3 | length 40.7
  Top Layer w0.254: U3.3@48.285,-55.88 48.387,-55.982 v1(61.392,-55.982)
  Bottom Layer w0.254: v1(61.392,-55.982) 61.392,-77.902 63.424,-79.934 P6.30@63.424,-82.702
IN_21: P6.32 U3.2 | length 41.1
  Top Layer w0.254: U3.2@48.285,-57.15 48.336,-57.201 v1(62.332,-57.201)
  Bottom Layer w0.254: v1(62.332,-57.201) 62.332,-77.14 62.687,-77.495 65.964,-80.772 P6.32@65.964,-82.702
IN_22: P6.33 U4.3 | length 39.2
  Top Layer w0.254: U4.3@48.285,-63.068 v1(63.017,-63.068)
  Bottom Layer w0.254: v1(63.017,-63.068) 63.017,-76.048 67.208,-80.239 67.208,-83.947 P6.33@68.504,-85.242
IN_23: P6.34 U4.2 | length 35.7
  Top Layer w0.254: U4.2@48.285,-64.338 48.336,-64.389 v1(63.652,-64.389)
  Bottom Layer w0.254: v1(63.652,-64.389) 63.652,-74.828 68.504,-79.68 P6.34@68.504,-82.702
INPUT_1: P1.3 P6.3 | length 14.5
  Top Layer w0.254: P6.3@30.404,-85.242 32.029,-86.868 40.818,-86.868 41.747,-87.797 P1.3@41.747,-89.941
INPUT_2: P1.4 R13.1 U1.6 | length 54.1
  Top Layer w0.254: R13.1@39.637,-41.326 39.814,-41.504 v1(41.91,-41.504) U1.6@43.205,-41.504
  Bottom Layer w0.254: v1(41.91,-41.504) 41.91,-87.706 42.494,-88.29 43.596,-88.29 P1.4@45.247,-89.941
INPUT_3: P1.5 R15.2 U1.7 | length 54.9
  Top Layer w0.254: R15.2@39.637,-43.028 39.891,-42.774 U1.7@43.205,-42.774 v1(44.425,-42.774)
  Bottom Layer w0.254: v1(44.425,-42.774) 44.425,-87.427 45.11,-88.113 46.918,-88.113 P1.5@48.747,-89.941
INPUT_4: P6.10 R57.1 U18.4 | length 105.6
  Top Layer w0.254: P6.10@38.024,-82.702 38.024,-73.914 43.104,-68.834 43.129,-68.859 v1(64.262,-68.859) ; v1(65.405,-12.7) 73.127,-12.7 73.444,-13.017 R57.1@73.444,-13.716 U18.4@76.448,-13.716
  Bottom Layer w0.254: v1(64.262,-68.859) 64.262,-13.843 v1(65.405,-12.7)
INPUT_5: P6.11 R65.1 U23.4 | length 109.2
  Top Layer w0.254: P6.11@40.564,-85.242 41.834,-83.972 41.834,-74.752 45.771,-70.815 v1(65.786,-70.815) ; v1(67.64,-8.382) 73.177,-8.382 73.431,-8.636 R65.1@73.431,-9.246 U23.4@76.372,-9.246
  Bottom Layer w0.254: v1(65.786,-70.815) 65.786,-14.783 67.64,-12.929 v1(67.64,-8.382)
INPUT_6: P6.12 R49.1 U15.4 | length 99.6
  Top Layer w0.254: P6.12@40.564,-82.702 40.564,-73.711 44.425,-69.85 v1(65.151,-69.85) ; v1(65.151,-17.297) 73.076,-17.297 73.431,-17.653 R49.1@73.431,-18.212 U15.4@76.296,-18.212
  Bottom Layer w0.254: v1(65.151,-69.85) v1(65.151,-17.297)
INPUT_7: P6.13 R66.1 U24.4 | length 52.9
  Top Layer w0.254: P6.13@43.104,-85.242 44.425,-83.922 44.425,-77.013 48.387,-73.05 69.24,-73.05 69.799,-73.609 69.799,-75.921 70.358,-76.479 72.974,-76.479 73.431,-76.937 R66.1@73.431,-77.622 74.143,-77.622 74.473,-77.953 74.473,-84.455 75.133,-85.115 U24.4@76.372,-85.115
INPUT_8: P6.14 R74.1 U28.4 | length 49.3
  Top Layer w0.254: P6.14@43.104,-82.702 43.104,-75.895 47.117,-71.882 70.028,-71.882 70.485,-72.339 70.485,-73.99 70.866,-74.371 73.05,-74.371 73.431,-74.752 R74.1@73.431,-75.489 74.422,-75.489 74.879,-75.946 74.879,-80.264 75.252,-80.636 U28.4@76.372,-80.636
INPUT_9: P6.15 R82.1 U32.4 | length 45.7
  Top Layer w0.254: P6.15@45.644,-85.242 46.939,-83.947 46.939,-78.664 50.952,-74.651 v1(67.259,-74.651) ; v1(67.259,-71.247) 72.949,-71.247 73.431,-71.73 R82.1@73.431,-73.508 74.473,-73.508 75.286,-74.32 75.286,-76.022 75.421,-76.157 U32.4@76.372,-76.157
  Bottom Layer w0.254: v1(67.259,-74.651) v1(67.259,-71.247)
INPUT_10: P6.16 R50.1 U16.4 | length 59.1
  Top Layer w0.254: P6.16@45.644,-82.702 45.644,-77.953 49.708,-73.889 v1(66.421,-73.889) ; v1(66.421,-52.705) 73.127,-52.705 73.431,-53.01 R50.1@73.431,-53.721 U16.4@76.331,-53.721
  Bottom Layer w0.254: v1(66.421,-73.889) v1(66.421,-52.705)
INPUT_11: P6.17
INPUT_12: P1.6 P6.18 | length 9.9
  Top Layer w0.254: P6.18@48.184,-82.702 49.53,-84.049 49.53,-86.843 50.063,-87.376 51.714,-87.376 52.247,-87.909 P1.6@52.247,-89.941
INPUT_13: P1.7 R14.1 U2.6 | length 55.3
  Top Layer w0.254: R14.1@39.637,-48.463 39.865,-48.692 U2.6@43.205,-48.692 45.06,-48.692 45.491,-49.124 45.491,-52.324 45.822,-52.654 v1(47.041,-52.654)
  Bottom Layer w0.254: v1(47.041,-52.654) 47.041,-87.097 48.438,-88.494 54.299,-88.494 P1.7@55.747,-89.941
INPUT_14: P2.1 R16.2 U2.7 | length 58.5
  Top Layer w0.254: R16.2@39.637,-50.165 39.84,-49.962 U2.7@43.205,-49.962 43.231,-49.936 44.526,-49.936 44.907,-50.317 44.907,-52.756 45.618,-53.467 v1(52.07,-53.467)
  Bottom Layer w0.254: v1(52.07,-53.467) 52.07,-86.716 53.252,-87.897 58.484,-87.897 P2.1@60.528,-89.941
INPUT_17: P6.24 R58.1 U20.4 | length 54.3
  Top Layer w0.254: P6.24@55.804,-82.702 55.804,-79.68 58.522,-76.962 v1(69.723,-76.962) ; v1(69.723,-48.184) 72.974,-48.184 73.431,-48.641 R58.1@73.431,-49.251 U20.4@76.34,-49.251
  Bottom Layer w0.254: v1(69.723,-76.962) v1(69.723,-48.184)
INPUT_18: P6.25
INPUT_19: P2.2 R21.1 U3.6 | length 55.8
  Top Layer w0.254: R21.1@39.637,-55.677 39.84,-55.88 U3.6@43.205,-55.88 44.907,-55.88 45.39,-56.363 45.39,-59.334 45.974,-59.919 v1(54.585,-59.919)
  Bottom Layer w0.254: v1(54.585,-59.919) 54.585,-86.411 55.665,-87.491 61.578,-87.491 P2.2@64.028,-89.941
INPUT_20: P2.3 P6.31 | length 5.3
  Top Layer w0.254: P6.31@65.964,-85.242 65.964,-88.377 P2.3@67.528,-89.941
INPUT_21: P2.4 R23.2 U3.7 | length 61.6
  Top Layer w0.254: R23.2@39.637,-57.328 39.814,-57.15 U3.7@43.205,-57.15 44.602,-57.15 44.78,-57.328 44.78,-60.147 45.339,-60.706 v1(57.15,-60.706)
  Bottom Layer w0.254: v1(57.15,-60.706) 57.15,-86.208 58.027,-87.085 68.171,-87.085 P2.4@71.028,-89.941
INPUT_22: P2.5 R22.1 U4.6 | length 59.1
  Top Layer w0.254: R22.1@39.637,-62.84 39.865,-63.068 U4.6@43.205,-63.068 45.187,-63.068 45.695,-63.576 45.695,-66.243 46.152,-66.7 v1(59.69,-66.7)
  Bottom Layer w0.254: v1(59.69,-66.7) 59.69,-86.182 60.186,-86.678 71.265,-86.678 P2.5@74.528,-89.941
INPUT_23: P2.6 R24.2 U4.7 | length 59.8
  Top Layer w0.254: R24.2@39.637,-64.516 39.814,-64.338 U4.7@43.205,-64.338 43.256,-64.389 44.526,-64.389 44.983,-64.846 44.983,-66.853 45.491,-67.361 v1(60.452,-67.361)
  Bottom Layer w0.254: v1(60.452,-67.361) 60.452,-78.511 62.154,-80.213 62.154,-85.428 62.997,-86.272 74.359,-86.272 P2.6@78.028,-89.941
INPUT_24: P2.7 P6.35 | length 12.4
  Bottom Layer w0.254: P6.35@71.044,-85.242 76.829,-85.242 P2.7@81.528,-89.941
JT_KR1: D14.K P47.1 | length 2.6
  Top Layer w0.254: P47.1@106.274,-3.531 106.3,-3.557 D14.K@106.3,-6.147
LDAC: P6.29 U5.13 | length 49
  Top Layer w0.254: P6.29@63.424,-85.242 64.719,-83.947 64.719,-81.686 65.253,-81.153 72.746,-81.153 73.254,-81.661 73.254,-85.833 75.381,-87.96 93.091,-87.96 93.853,-87.198 93.853,-79.908 94.564,-79.197 U5.13@96.245,-79.197
LOAD: P6.28 U5.8 | length 47.5
  Top Layer w0.254: P6.28@60.884,-82.702 60.884,-80.442 61.747,-79.578 v1(72.72,-79.578) ; v1(72.72,-82.017) 72.72,-85.874 75.212,-88.367 93.624,-88.367 94.259,-87.732 94.259,-85.954 94.666,-85.547 U5.8@96.245,-85.547
  Bottom Layer w0.254: v1(72.72,-82.017) v1(72.72,-79.578)
NetD1_2: D1.2 F1.1 | length 7.9
  Top Layer w0.762: F1.1@10.332,-10.729 10.398,-10.795 10.474,-10.719 11.659,-10.719 14.097,-10.719 15.342,-11.963 D1.2@15.342,-14.287
NetD14_A: D14.A U15.2 | length 30.6
  Top Layer w0.254: U15.2@82.321,-15.697 83.896,-15.697 84.353,-15.24 84.353,-11.938 84.811,-11.481 103.429,-11.481 104.52,-10.39 D14.A@104.52,-6.147
NetD15_A: D15.A U16.2 | length 25.4
  Top Layer w0.254: U16.2@82.372,-51.222 84.033,-51.222 84.531,-50.724 84.531,-49.835 84.811,-49.555 105.942,-49.555 D15.A@106.349,-49.149
NetD18_A: D18.A U18.2 | length 17.7
  Top Layer w0.254: U18.2@82.474,-11.201 83.795,-11.201 85.471,-9.525 95.885,-9.525 96.392,-9.018 D18.A@96.392,-6.147
NetD19_A: D19.A U20.2 | length 26.1
  Top Layer w0.254: U20.2@82.372,-46.743 84.614,-46.743 85.623,-47.752 105.537,-47.752 106.339,-46.95 D19.A@106.339,-45.593
NetD22_A: D22.A U23.2 | length 6.2
  Top Layer w0.254: U23.2@82.423,-6.756 84.938,-6.756 85.573,-6.121 88.289,-6.121 D22.A@88.315,-6.147
NetD23_A: D23.A U24.2 | length 35.6
  Top Layer w0.254: U24.2@82.372,-82.575 88.443,-82.575 88.875,-82.144 88.875,-78.283 89.84,-77.318 103.124,-77.318 104.242,-78.435 104.242,-84.861 104.877,-85.496 D23.A@106.349,-85.496
NetD27_A: D27.A U28.2 | length 29
  Top Layer w0.254: U28.2@82.372,-78.096 88.324,-78.096 89.51,-76.911 104.089,-76.911 104.673,-77.495 104.673,-81.712 104.953,-81.991 D27.A@106.349,-81.991
NetD32_A: D32.A U32.2 | length 26.8
  Top Layer w0.254: U32.2@82.372,-73.617 84.768,-73.617 86.157,-75.006 103.48,-75.006 105.105,-76.632 105.105,-78.13 105.41,-78.435 D32.A@106.339,-78.435